# Altium PCB top_pcb_4layers_positive.PcbDoc (part 2 of 2)
Units mil, origin at the board's own origin, x right, y up, seen from the top; angles counter-clockwise.
Board outline 1559.84 x 1559.84 mil, 4 copper layers (Top Layer, GND_positive, Power_positive, Bottom Layer); 135 components, 124 nets, 727 pads, 408 vias.
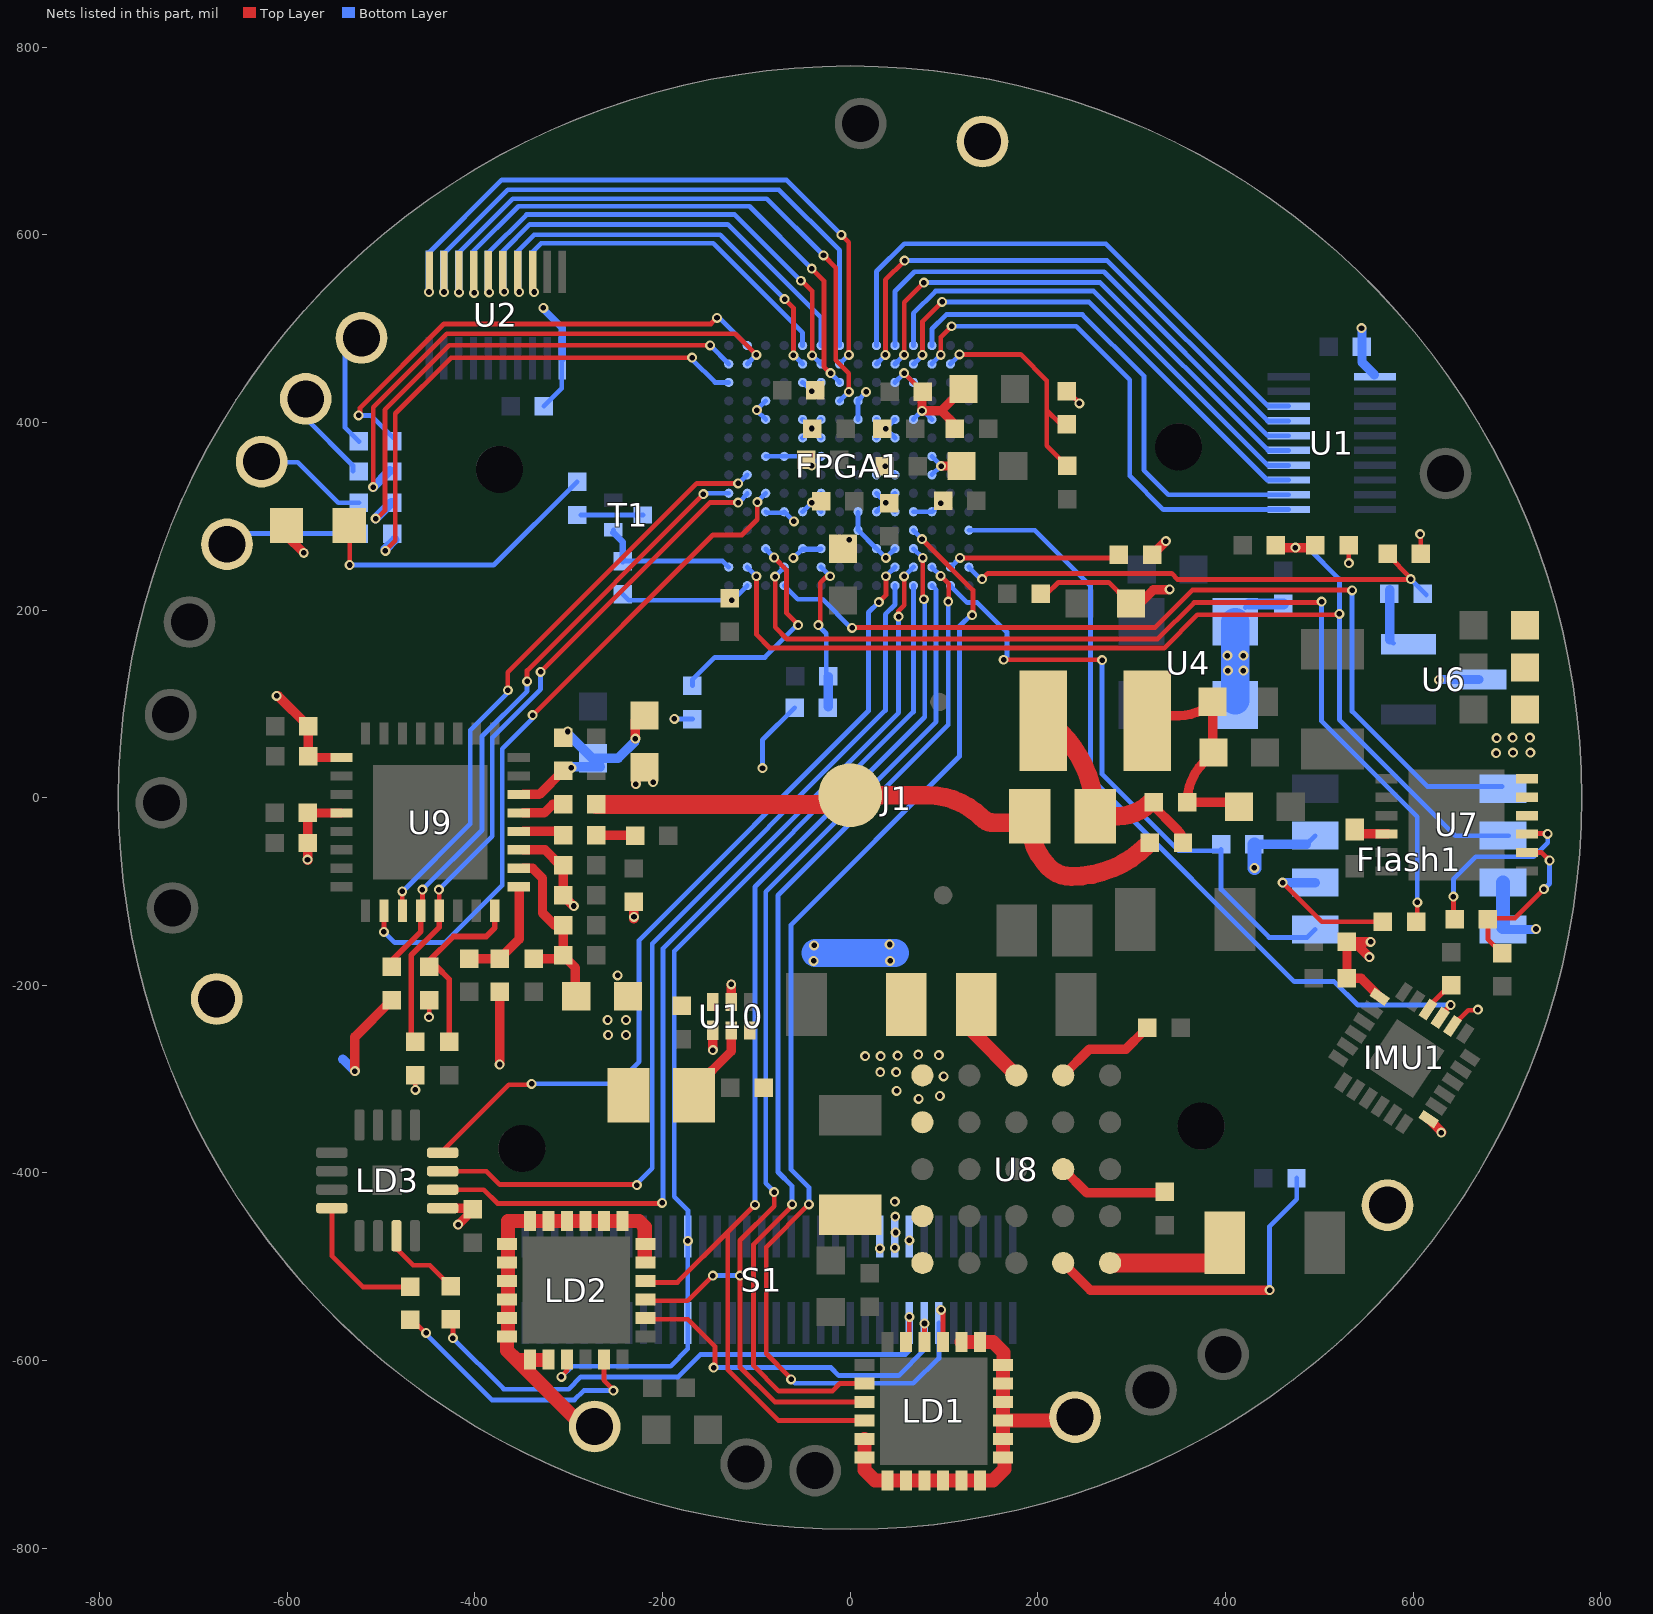
[diagram p4: the nets of this part, all layers, seen from the top]

## Via types
v1: diameter 10.63, hole 5.91, Top Layer to Bottom Layer, 324 vias
v2: diameter 10.63, hole 5.91, Top Layer to Bottom Layer, tented bottom, 83 vias
v3: diameter 19.68, hole 7.87, Top Layer to Bottom Layer, tented both sides, 1 vias

## Nets (pads, with @x,y where several pads share a name; then routed paths per layer and width w, separated by ;. In a path a pad name is that pad's centre, name@x,y a point inside that pad or via, vN(x,y) a via of type N, cw(c..) or ccw(c..) an arc to the next point about the centre after c; other vN are vias at no path point) (continued)
IMU_SPI3: FPGA1.L1 IMU1.9 | length 861.1
  Top Layer w5.12: IMU1.9@628.95,-234.59 628.95,-232.05 v1(640,-221)
  Bottom Layer w5.12: FPGA1.L1@126.45,285.1 196.9,285.1 256,226 256,21.5 473.5,-196 516,-196 541,-221 v1(640,-221)
J_TCK: T_TCK1.0 Z6.1 | length 98
  Bottom Layer w5.12: T_TCK1.0@-580.4,425.12 -580.4,404.4 -530,354 Z6.1@-530,348
J_TDI: T_TDI1.0 Z3.1 | length 125.8
  Bottom Layer w5.12: Z3.1@-523.71,379.68 -538.5,394.47 -538.5,472.5 T_TDI1.0@-519.5,491.5
J_TDO: T_TDO1.0 Z4.1 | length 131.4
  Bottom Layer w5.12: T_TDO1.0@-657.4,281.5 Z4.1@-526,281.5
J_TMS: T_TMS1.0 Z5.1 | length 120.8
  Bottom Layer w5.12: T_TMS1.0@-626.5,357 -626,357.5 -589,357.5 -545.77,314.27 Z5.1@-523.77,314.27
L\E\D\0\_\A\C\T\I\V\E\: FPGA1.L4 LD1.21 S1.30 | length 1300.9
  Top Layer w5.12: v1@-64.25,-617.75 -89.5,-592.5 -89.5,-479 v1(-44,-433.5) ; v1(76.5,275.5) 130.75,221.25 130.75,193.25 v1@130.5,193.5 ; LD1.21@98.37,-579.68 LD1.21@98.37,-571.13 ; LD1.21@98.87,-580.18 v1@98.87,-546.37
  Bottom Layer w5.12: v1(-63,-620) -58.88,-624.12 67,-624.12 94.62,-597.71 S1.30@94.57,-560.06 S1.30@94.57,-560.06 ; v1(-44,-433.5) -44,-415.5 -63,-396.5 -63,-135.5 116.5,44 116.5,182.5 v1@130,196 ; FPGA1.L4@67.4,285.1 v1@77,275.5 ; v1@77,275.5 77.5,275 v1@77,275.5
  other v1: 97,-546 130,194.5
L\E\D\1\_\A\C\T\I\V\E\: FPGA1.P4 LD2.21 S1.13 S1.58 | length 1093.4
  Top Layer w5.12: v1@-307.5,-616 -301.87,-610.37 LD2.21@-301.87,-598.82 ; v1(-173,-472.5) -172,-471.5 v1@-171.5,-471.5
  Bottom Layer w5.12: v1(-308,-617.5) -296.5,-606 -289,-606 ; -288.5,-606 -191.5,-606 -173.15,-587.65 S1.13@-173.15,-560.06 S1.58@-173.15,-471 ; S1.58@-173,-471 -173,-440 -187.5,-425.5 -187.5,-163.5 67.4,91.4 FPGA1.P4@67.4,226.05
LED0: FPGA1.N3 LD1.2 | length 1090.9
  Top Layer w5.12: v1(-62,-433.5) -62,-435 -103,-476 -103,-605.5 -76,-632.5 -19,-632.5 -10.97,-624.47 LD1.2@15.21,-624.47 ; v1(96.32,236.5) 105,227.82 v1@105,209 ; v1@104.5,208.5 v1(104.5,209) v1@104.5,209.82
  Bottom Layer w5.12: v1@-62.25,-433.25 -62,-433 -62,-414 -77,-399 -77,-104 104.5,77.5 v1(104.5,209) ; FPGA1.N3@87.08,245.73 v1(96.32,236.5)
LED1: FPGA1.M4 LD1.4 LD2.4 | length 1246
  Top Layer w5.12: LD2.4@-218.21,-515.16 -216.71,-516.66 -184.16,-516.66 -130.5,-463 ; v1(-101.5,-434) -130.5,-463 ; LD1.4@15.21,-663.84 -76.66,-663.84 -130.5,-610 -130.5,-463 ; v1(77.31,255.5) 77.31,212.69 v1(78.5,211.5)
  Bottom Layer w5.12: v1(-101.5,-434) -101.5,-95 79.5,86 79.5,210.5 v1(78.5,211.5) ; FPGA1.M4@67.4,265.42 v1(77.31,255.5)
LED2: FPGA1.P3 LD1.3 LD2.3 | length 1189.5
  Top Layer w5.12: LD2.3@-218.21,-534.84 -216.71,-536.34 -173.34,-536.34 v1(-146.5,-509.5) ; v1(-81,-420.5) -81,-435.5 -117.5,-472 v1(-117.5,-509.5) -117.5,-607 -80.34,-644.16 LD1.3@15.21,-644.16
  Bottom Layer w5.12: v1(-146.5,-509.5) v1(-117.5,-509.5) ; v1(-81,-420.5) -81,-420 -90,-411 -90,-100.5 91.5,81 91.5,221.63 FPGA1.P3@87.08,226.05
LED22-2: LD1.22 LD2.2 S1.29 | length 397.4
  Top Layer w5.12: LD2.2@-218.21,-554.53 -216.71,-556.03 -173.03,-556.03 -144,-585.05 -144,-606 v1(-145.5,-607.5) ; LD1.22@79.19,-580.18 v1(79.19,-560.5)
  Bottom Layer w5.12: v1(-145.5,-607.5) -20.5,-607.5 -12,-616 51.5,-616 78.82,-588.68 S1.29@78.82,-560.06
LED_SPI0: FPGA1.N5 LD3.4 | length 891
  Top Layer w5.12: LD3.4@-435.5,-377.5 -364,-306 v1@-340.5,-306 ; v1(30.5,208.5) 38,216 v1(38,236.02)
  Bottom Layer w5.12: v1@-341,-304 -340,-305 -248.5,-305 -225,-281.5 -225,-152 19.5,92.5 19.5,197.5 v1(30.5,208.5) ; v1(38,236.02) FPGA1.N5@47.71,245.73
  other v1: -339.5,-305
LED_SPI1: FPGA1.P5 LD3.3 | length 964.4
  Top Layer w5.12: LD3.3@-434.44,-398.16 -387.84,-398.16 -373.5,-412.5 v1@-227.5,-412.5
  Bottom Layer w5.12: v1@-227.5,-411.5 -211,-395 -211,-155.5 37.5,93 37.5,195.5 47.71,205.71 FPGA1.P5@47.71,226.05
  other v1: -227.5,-413
LED_SPI2: FPGA1.N4 LD3.2 | length 1029.3
  Top Layer w5.12: LD3.2@-434.44,-417.84 -390.66,-417.84 -376,-432.5 v1@-200.5,-432.5 ; v1@51.5,191.5 v1(51.5,193) 51.5,199 57.5,205 v1(57.5,235.83)
  Bottom Layer w5.12: v1@-199.5,-431.5 -199.5,-160.5 51.5,90.5 v1(51.5,193) ; v1(57.5,235.83) FPGA1.N4@67.4,245.73
  other v1: -200.5,-432
LEDA: LD1.5 LD1.6 LD1.7 LD1.8 LD1.9 LD1.10 LD1.11 LD1.12 LD1.13 LD1.14 LD1.15 LD1.16 LD1.17 LD1.18 LD1.19 LD1.20 T_LEDA.0 | length 444.7
  Top Layer w5.12: T_LEDA.0@238.84,-663.84 T_LEDA.0@239,-664
  Top Layer w15: LD1.5@15.21,-683.53 LD1.6@15.21,-703.21 15.21,-716.71 26.5,-728 LD1.7@44.5,-728 ; LD1.7@39.82,-727.82 LD1.8@59.5,-727.82 LD1.9@79.19,-727.82 LD1.10@98.87,-727.82 LD1.11@118.56,-727.82 LD1.12@137.32,-727.82 ; LD1.20@118.56,-580.18 LD1.19@138.24,-580.18 152.18,-580.18 163.5,-591.5 LD1.18@163.5,-605.5 ; LD1.12@138.24,-727.82 152.18,-727.82 164.5,-715.5 LD1.13@164.5,-704.5 ; LD1.13@162.85,-703.21 LD1.14@162.85,-683.53 LD1.15@162.85,-663.84 ; LD1.18@162.85,-605.35 LD1.17@162.85,-624.47 LD1.16@162.85,-644.16 LD1.15@162.85,-663.84 ; T_LEDA.0@238.84,-663.84 LD1.15@162.85,-663.84
LEDC: LD2.5 LD2.6 LD2.7 LD2.8 LD2.9 LD2.10 LD2.11 LD2.12 LD2.13 LD2.14 LD2.15 LD2.16 LD2.17 LD2.18 LD2.19 LD2.20 T_LEDC.0 | length 464.6
  Top Layer w5.12: T_LEDC.0@-289.12,-665.88 T_LEDC.0@-276.4,-665.88
  Top Layer w15: LD2.18@-365.85,-574.21 -365.85,-589.15 -355.5,-599.5 ; LD2.18@-364.68,-568.5 -364.68,-451.18 LD2.12@-341.24,-451.18 LD2.11@-321.56,-451.18 LD2.10@-301.87,-451.18 LD2.9@-282.19,-451.18 LD2.8@-262.5,-451.18 LD2.7@-246,-451.18 ; LD2.20@-325,-599.5 -355.5,-599.5 ; T_LEDC.0@-289.12,-665.88 -355.5,-599.5 ; LD2.7@-242.82,-451.18 -225.32,-451.18 -219,-457.5 LD2.5@-219,-493
MISO_A1+: FPGA1.B4 U1.18 | length 523.9
  Top Layer w5.12: v2(77,472) 77,507.5 v2(98,528.5)
  Bottom Layer w5.12: FPGA1.B4@67.4,462.27 67.77,462.27 v2@75,469.5 ; v2(98,528.5) 254.5,528.5 444.37,338.63 U1.18@467.44,338.63
MISO_A1-: FPGA1.A4 U1.17 | length 521.5
  Bottom Layer w5.12: FPGA1.A4@67.4,481.95 67.4,516.4 91,540 259.5,540 445.5,354 467.06,354 U1.17@467.44,354.38
MISO_A2+: FPGA1.B3 U1.20 | length 546.5
  Top Layer w5.12: v2(96.5,472) 96.5,491 v2(108,502.5)
  Bottom Layer w5.12: FPGA1.B3@87.08,462.27 87.08,462.58 v2@94.5,470 ; v2(108,502.5) 241,502.5 298,445.5 298,343 333.87,307.13 U1.20@467.44,307.13
MISO_A2-: FPGA1.A3 U1.19 | length 542.8
  Bottom Layer w5.12: FPGA1.A3@87.08,481.95 87.08,499.58 102.5,515 247.5,515 313,449.5 313,349 339.12,322.88 U1.19@467.44,322.88
MISO_B1+: FPGA1.D8 pad.0@-417,560.5 U2.18 | length 629.5
  Top Layer w5.12: v2(-28.5,578) -15.5,565 -15.5,466.5 -1.5,452.5 v2(-1.5,432.5)
  Bottom Layer w5.12: U2.18@-417.37,559.56 -417.37,580.63 -359.5,638.5 -89,638.5 v2(-28.5,578) ; FPGA1.D8@-11.34,422.9 -11.1,422.9 v2(-1.5,432.5)
  other v1: -417,538.5
MISO_B1-: FPGA1.C8 pad.0@-401.5,560.5 U2.17 | length 564.5
  Top Layer w5.12: v2(-41,564) -28,551 -28,459.5 v2(-21,452.5)
  Bottom Layer w5.12: U2.17@-401.62,559.56 -401.62,582.38 -353.62,630.38 -107.38,630.38 v2(-41,564) ; v2(-21,452.5) -11.34,442.84 FPGA1.C8@-11.34,442.58
  other v1: -401,538
MISO_B2+: FPGA1.B8 pad.0@-448.5,560 U2.20 | length 662.5
  Top Layer w5.12: v2(-9.5,600) -1.5,592 v2(-1.5,472)
  Bottom Layer w5.12: U2.20@-448.87,559.56 -448.87,581.13 -371.5,658.5 -68,658.5 v2(-9.5,600) ; FPGA1.B8@-11.34,462.27 -11.34,462.66 v2(-1.5,472)
  other v1: -449,539
MISO_B2-: FPGA1.A8 pad.0@-433,560.5 U2.19 | length 598.5
  Bottom Layer w5.12: U2.19@-433.12,559.56 -433.12,579.88 -365,648 -76,648 -11.34,583.34 FPGA1.A8@-11.34,481.95
  other v1: -433,539
MOSI_A+: FPGA1.B5 U1.16 | length 559.5
  Top Layer w5.12: v2(57.5,472) 57.5,528 v2(78.5,549)
  Bottom Layer w5.12: FPGA1.B5@47.71,462.27 55,469.56 v2@55,470 ; v2(78.5,549) 266.5,549 445.37,370.13 U1.16@467.44,370.13
MOSI_A-: FPGA1.A5 U1.15 | length 558.4
  Bottom Layer w5.12: FPGA1.A5@47.71,481.95 47.71,539.71 68.5,560.5 270.5,560.5 445.13,385.87 U1.15@467.44,385.87
MOSI_B+: FPGA1.B9 pad.0@-386,560.5 U2.16 | length 499.3
  Top Layer w5.12: v2(-52.5,551) -52,551.5 -40.5,540 v2(-40.5,471.5)
  Bottom Layer w5.12: U2.16@-385.87,559.56 -385.87,580.63 -345,621.5 -123,621.5 v2(-52.5,551) ; v2@-40.38,471.62 FPGA1.B9@-31.03,462.27
  other v1: -385,538.5
MOSI_B-: FPGA1.A9 pad.0@-370.5,560.5 U2.15 | length 444.5
  Bottom Layer w5.12: U2.15@-370.13,559.56 -370.13,582.37 -341.5,611 -130.5,611 -31.03,511.53 FPGA1.A9@-31.03,481.95
  other v1: -369,539.5
NetC1_2: C1.2 C2.2 L5.1 L7.2 R10.1 | length 243.1
  Top Layer w5.12: C1.2@376.88,37.84 C1.2@385.01,45.97
  Top Layer w10: L7.2@317.01,87.39 350.49,87.39 ccw(c350.49,137.95) C2.2@386.24,102.2 C1.2@386.24,44.74 ; C1.2@376.88,37.84 ccw(c419.54,-4.82) R10.1@359.21,-4.82 L5.1@412.82,-4.82
NetC7_2: C7.2 C8.2 C9.2 L3.2 U9.10 | length 203.3
  Top Layer w10: U9.10@-348.35,-75.3 -338.57,-75.3 -328,-85.87 -328,-123 -314.81,-136.18 C8.2@-305.98,-136.18 C7.2@-305.98,-168.18 ; C9.2@-337.18,-171.56 -309.36,-171.56 C7.2@-305.98,-168.18 ; L3.2@-292.06,-211.75 -293,-210.82 -293,-181.17 C7.2@-305.98,-168.18
NetC15_2: C15.2 C16.2 C17.2 L4.1 U9.14 | length 211.1
  Top Layer w5.12: L4.1@-229,82.5 L4.1@-228.5,83
  Top Layer w10: U9.14@-348.35,3.44 -331.36,3.44 C16.2@-305.98,28.82 ; v1(-229,63) L4.1@-229,82.5
  Bottom Layer w5.12: v1@-300.84,67.78 v1@-300.84,70.83 ; v1@-229,60.5 v1@-229,62.5
  Bottom Layer w10: v1@-300.84,67.78 -266.16,33.11 v1@-297.28,33.11 ; C17.2@-274.18,42.06 -247.44,42.06 v1@-229,60.5
  other v1: -297.34,31.73 -301.09,70.52
NetC18_1: C18.1 J1.0 L6.1 R9.2 | length 648.4
  Top Layer w5.12: J1.0@4.82,-7.18 J1.0@5,-7 ; R9.2@316.57,-50.52 R9.2@319.28,-47.82
  Top Layer w20: C18.1@-270.55,-7.18 J1.0@4.82,-7.18 ; J1.0@0,2.56 82.42,2.56 cw(c82.42,-79.58) 140.5,-21.5 ccw(c153.04,-8.96) 153.04,-26.69 191.86,-26.69 ccw(c258.66,-26.69) 211.43,-73.93 ccw(c235.75,-49.6) 235.75,-84 ccw(c235.75,30.31) R9.2@316.57,-50.52
NetC18_2: C18.2 U9.13 | length 46.1
  Top Layer w10: U9.13@-348.35,-16.24 -326.24,-16.24 -317.18,-7.18 C18.2@-305.98,-7.18
NetC19_1: C19.1 R3.1 | length 42.9
  Top Layer w10: C19.1@-270.55,-40.18 R3.1@-227.68,-40.18
NetC19_2: C19.2 U9.12 | length 44.1
  Top Layer w10: U9.12@-348.35,-35.93 -310.24,-35.93 C19.2@-305.98,-40.18
NetC20_2: C20.2 R4.1 U9.9 | length 117.8
  Top Layer w10: C20.2@-406.18,-171.56 R4.1@-373.68,-171.56 -353,-150.87 -353,-95.33 U9.9@-353.35,-94.98
NetD1_2: D1.2 Z10.2 | length 321.3
  Top Layer w5.12: D1.2@-534.04,290 -533.5,289.46 v1(-533.5,248)
  Bottom Layer w5.12: v1(-533.5,248) -379.9,248 Z10.2@-291.18,336.72
NetFPGA1_B2: FPGA1.B2 Z1.1 Z2.2 | length 238.5
  Top Layer w5.12: v2(116.5,472.5) 181.62,472.5 209.48,444.63 209.48,412.69 ; Z1.1@223.7,398.48 209.48,412.69 ; Z2.2@233.16,351.49 209.48,375.16 209.48,412.69
  Bottom Layer w5.12: FPGA1.B2@106.77,462.27 v2@114.5,470
NetFPGA1_M12: FPGA1.M12 Z33.2 | length 238.3
  Top Layer w5.12: v1(-81,256) -68,243 -68,197 v1@-56,185
  Bottom Layer w5.12: Z33.2@-168.18,119.22 -168.18,125.82 -144.5,149.5 -91,149.5 -58,182.5 v1@-54.5,182.5 ; FPGA1.M12@-90.08,265.42 -90.08,265.08 v1(-81,256)
  other v1: -55.5,184
NetFPGA1_N11: FPGA1.N11 Z9.2 | length 1052.4
  Top Layer w5.12: v2(-80,235.5) -80,181.62 -67.38,169 327.5,169 366.5,208 500.5,208 v1@501,208.5 ; Z9.2@603.22,-132.18 604.5,-130.9 v1(604.5,-111.5)
  Bottom Layer w5.12: v2@-79.5,236.5 -70.4,245.6 FPGA1.N11@-70.4,245.73 ; v1@502.5,208 502.5,81.5 604.5,-20.5 v1(604.5,-111.5)
  other v1: 502.5,209
NetIMU1_10: IMU1.10 Q50.1 | length 35.5
  Top Layer w5.12: IMU1.10@615.89,-225.79 615.89,-223.42 Q50.1@639.32,-199.99
NetL2_1: L2.1 U10.2 | length 79
  Top Layer w5.12: L2.1@-165.51,-310.98 L2.1@-165.51,-308.97
  Top Layer w10: L2.1@-165.51,-308.97 -126.82,-270.28 U10.2@-126.82,-248
NetL6_2: L6.2 L7.1 R9.1 R10.2 | length 243
  Top Layer w5.12: L7.1@206.38,87.39 L7.1@223.98,69.79 ; L6.2@261.05,-19.69 285.07,-19.69
  Top Layer w10: R10.2@319.78,-5.32 349.36,-34.9 cw(c336.44,-47.82) R9.1@354.71,-47.82
  Top Layer w20: L7.1@223.98,69.79 cw(c134.5,-19.69) L6.2@261.05,-19.69 ; 285.07,-19.69 ccw(c285.07,29.39) R10.2@319.78,-5.32
NetLD2_23: LD2.23 Z31.2 | length 296.3
  Top Layer w5.12: Z31.2@-469.18,-556.72 -466.78,-556.72 -452.5,-571 v1@-452,-571 ; LD2.23@-262.5,-600.5 LD2.23@-260.5,-598.5 ; LD2.23@-262.5,-598.82 -262.5,-621 v1@-252.5,-631
  Bottom Layer w5.12: v1@-453,-571 -382,-642 -294,-642 -284,-632 v1(-252.5,-632)
  other v1: -452,-570.5
NetLD3_12: LD3.12 Z31.1 | length 145.7
  Top Layer w5.12: LD3.12@-552.56,-437.53 -552.56,-488.44 -519.5,-521.5 Z31.1@-471.5,-521.5
NetLD3_15: LD3.15 Z30.1 | length 105.1
  Top Layer w5.12: LD3.15@-483.66,-481.84 LD3.15@-483.66,-467.06 ; LD3.15@-483.5,-465 -483.5,-481 -466,-498.5 -447.97,-498.5 Z30.1@-425.68,-520.79
NetQ29_2: Q29.2 U7.4 | length 37.8
  Top Layer w5.12: Q29.2@535,-38 Q29.2@535.34,-38.34
  Top Layer w10: Q29.2@535.34,-38.34 U7.4@572.7,-38.34
NetQ34_2: Q34.2 U8.A3 | length 95.1
  Top Layer w5.12: Q34.2@130.85,-249.85 Q34.2@130.85,-220
  Top Layer w15: Q34.2@130.85,-249.85 U8.A3@177,-296
NetQ35_2: Q35.2 U8.E5 | length 125.2
  Top Layer w5.12: Q35.2@396.5,-496 Q35.2@400.5,-500
  Top Layer w20: U8.E5@277,-496 Q35.2@396.5,-496
NetR5_1: R5.1 R6.2 U9.8 | length 202.6
  Top Layer w6: R6.2@-427.31,-260.28 -427.31,-193.68 -440.71,-180.29 R5.1@-448.68,-180.29 -448.68,-173.68 -423,-148 -388,-148 -378.94,-138.94 U9.8@-378.94,-120.57
NetT1_3: T1.3 Z10.1 | length 66.3
  Bottom Layer w5.12: Z10.1@-287.26,301.26 T1.3@-220.95,301.26
NetU6_2: U6.2 Z8.2 | length 58.9
  Bottom Layer w5.12: U6.2@575.28,168.22 U6.2@579,164.5
  Bottom Layer w10: U6.2@575.28,168.22 Z8.2@575.28,221.82
NetU7_8: U7.8 Z18.2 Z19.1 | length 180.5
  Top Layer w5.12: Z18.2@681,-128.5 708.5,-128.5 v1(739.5,-97.5) ; Z18.2@685.82,-129.68 Z18.2@679.72,-129.68 679.72,-150.69 Z19.1@694.82,-165.79 ; U7.8@721.3,-58.53 737.03,-58.53 v1(745.5,-67)
  Bottom Layer w5.12: v1(739.5,-97.5) 745.5,-91.5 v1(745.5,-67)
NetU7_9: U7.9 Z18.1 | length 188.2
  Top Layer w5.12: v1(643,-105.5) 643,-128.4 Z18.1@644.29,-129.68 ; U7.9@722.3,-38.34 v1@741.16,-38.34
  Bottom Layer w5.12: v1(643,-105.5) 643,-87 667,-63 728.5,-63 743.5,-48 v1(743.5,-38.5)
NetU8_A4: U8.A4 Z21.1 | length 105.5
  Top Layer w10: U8.A4@227,-296 255,-268 294,-268 Z21.1@313,-249
NetU8_C4: U8.C4 Z20.1 | length 116.6
  Top Layer w5.12: Z20.1@329,-421 Z20.1@332,-424
  Top Layer w10: U8.C4@227,-396 252,-421 Z20.1@329,-421
NetU8_E4: U8.E4 Z22.1 | length 363.5
  Top Layer w10: U8.E4@227,-496 256,-525 v1(447,-525)
  Bottom Layer w5.12: v1(447,-525) 447,-457 476,-428 Z22.1@476,-405.5
PCLK: FPGA1.H13 U9.3 | length 640.7
  Top Layer w5.12: v2(-477.5,-100) -477.5,-120.44 U9.3@-477.36,-120.57 ; v2(-365,114.5) -365,133.5 -163.5,335 v2(-119.5,335)
  Bottom Layer w5.12: v2@-479,-101.5 v2@-478.5,-101.5 ; v2@-477.25,-100.25 -405,-28 -405,72 v2@-365,112 ; v2@-119,335.5 -118.43,335.5 FPGA1.H13@-109.77,344.16
S_CLOCK: Flash1.6 FPGA1.N13 Z16.1 Z17.2 | length 1200.6
  Top Layer w5.12: v2(-100,236) -100,174 -85.5,159.5 334.5,159.5 370,195 v1@521.5,195 ; Z16.1@493.47,266.5 Z16.1@495.79,268.82
  Top Layer w10: Z17.2@456.04,266.5 v1(474.5,266.5) Z16.1@493.47,266.5
  Bottom Layer w5.12: FPGA1.N13@-109.77,245.73 v2(-100,236) ; v1@475,266 488.52,266 521.5,233.02 v1(521.5,196) 521.5,83 645,-40.5 Flash1.6@695.68,-40.5 Flash1.6@702,-40.5
S_DATA_IN: Flash1.5 FPGA1.P11 | length 963.2
  Top Layer w5.12: v1(2,181) 2,179.5 4,181.5 325,181.5 365,221.5 v1@534.5,221.5
  Bottom Layer w5.12: FPGA1.P11@-70.4,226.05 -55.85,211.5 -29.5,211.5 v1@0.75,181.25 ; v1(535,221) 535,92 615,12 Flash1.5@695,12
S_DATA_OUT: Flash1.2 Z9.1 | length 158.7
  Top Layer w5.12: v1(461,-90.5) 502.68,-132.18 Z9.1@567.79,-132.18
  Bottom Layer w10: v1(461,-90.5) Flash1.2@495.68,-90.5
S_SELCTN: Flash1.1 FPGA1.P2 Z15.1 | length 662.4
  Top Layer w5.12: v1(163.5,147) v1@268,147
  Bottom Layer w5.12: FPGA1.P2@106.77,226.05 124.81,208 135.5,208 167,176.5 v1@167,149 ; v1(268.5,146.5) 268.5,25 350,-56.5 Z15.1@395.29,-56.5 ; Z15.1@395.29,-55.32 Z15.1@395.29,-56.5 ; Flash1.1@495.68,-140.5 487.18,-149 446.5,-149 395.29,-97.79 Z15.1@395.29,-56.5
SCL: FPGA1.J14 R8.1 U9.4 | length 668
  Top Layer w5.12: U9.4@-457.68,-120.57 -456,-118.89 v2(-456,-98) ; v2(-344.5,124) -344.5,135.5 v2(-156.5,323.5)
  Top Layer w6: R8.1@-488.68,-180.29 -488.68,-173.68 -457.68,-142.68 U9.4@-457.68,-120.57
  Bottom Layer w5.12: v2(-456,-98) -392.5,-34.5 -392.5,65.5 -344.5,113.5 v2(-344.5,124) ; v2@-156.03,324.47 FPGA1.J14@-129.45,324.47
SCLK_A+: FPGA1.B6 U1.14 | length 598.4
  Top Layer w5.12: v2(37.5,472) 37.5,552 v2@57.5,572
  Bottom Layer w5.12: FPGA1.B6@28.03,462.27 v2@35,469.24 ; v2(58,572.5) 274,572.5 444.88,401.62 U1.14@467.44,401.62
SCLK_A-: FPGA1.A6 U1.13 | length 602.4
  Bottom Layer w5.12: FPGA1.A6@28.03,481.95 28.03,561.03 57.5,590.5 272.5,590.5 445.63,417.37 U1.13@467.44,417.37
SCLK_B+: FPGA1.B10 pad.0@-354.5,560.5 U2.14 | length 420.8
  Top Layer w5.12: v2(-70,531.5) -60.5,522 v2(-60.5,471.5)
  Bottom Layer w5.12: U2.14@-354.38,559.56 -354.38,582.62 -337,600 -138.5,600 v2(-70,531.5) ; v2@-60.5,472 -60.44,472 FPGA1.B10@-50.71,462.27
  other v1: -353,539
SCLK_B-: FPGA1.A10 pad.0@-338.5,560.5 U2.13 | length 367.1
  Bottom Layer w5.12: U2.13@-338.63,559.56 -338.63,581.87 -329.5,591 -146.21,591 -50.71,495.5 FPGA1.A10@-50.71,481.95
  other v1: -337,539
SDA: FPGA1.J13 R7.1 U9.5 | length 744.5
  Top Layer w5.12: U9.5@-437.99,-120.57 v2@-437.99,-98.51 ; v2(-330,134) -149.5,314.5 v2(-119.5,314.5)
  Top Layer w6: R7.1@-468,-255.97 -468,-168 -438,-138 U9.5@-437.99,-120.57
  Bottom Layer w5.12: v2(-438.5,-98) -381.5,-41 -381.5,64 -330,115.5 v2(-330,134) ; v2@-118,315.5 -109.77,323.73 FPGA1.J13@-109.77,324.47
VCC33: Q26.2 Q27.2 Q28.2 Q42.1 Q43.1 T_VCC33.0 U1.10 U2.10 U7.10 U7.11 U7.12 | length 192.4
  Top Layer w5.12: Q27.2@719.27,183.8 Q27.2@719.27,193.73
  Bottom Layer w5.12: Q43.1@-326.51,417.18 -307.5,436.19 U2.10@-307.5,474
  Bottom Layer w8: v1(-327,522) -327.5,522 -328,521.5 -307.13,500.63 U2.10@-307.13,467.94
  Bottom Layer w10: v1@545.49,499.99 Q42.1@545.49,480.68 545.49,464.01 U1.10@558.5,451
  other v1: 688.5,47.5 706.5,48 725,48 689,63.5 706,64 724.5,64 545,500.5
VDD12: FPGA1.E5 FPGA1.E6 FPGA1.E9 FPGA1.E10 FPGA1.F5 FPGA1.F6 FPGA1.F9 FPGA1.F10 FPGA1.J5 FPGA1.J6 FPGA1.J9 FPGA1.K5 FPGA1.K6 FPGA1.K9 FPGA1.K10 Q6.2 Q7.2 Q8.2 Q9.2 Q10.2 Q33.2 U8.A1 U8.B1 | length 242.1
  Top Layer w5.12: Q33.2@59.65,-220.5 59.65,-215.5 Q33.2@59.65,-207.65
  Top Layer w6: Q33.2@59.65,-215.5 Q33.2@74.65,-200.5
  Bottom Layer w5.12: FPGA1.K10@-50.71,304.79 v2(-41,314.5) ; FPGA1.F10@-50.71,383.53 -41,393.24 v2(-41,393.5) ; FPGA1.E10@-50.71,403.21 v2(-41,393.5) ; v2@-40,392.5 FPGA1.F9@-31.03,383.53 ; FPGA1.K9@-31.03,304.79 -40.74,314.5 v2(-41,314.5) ; FPGA1.J9@-31.03,324.47 v2(-41,314.5) ; FPGA1.E9@-31.03,403.21 -31.29,403.21 v2(-41,393.5) ; FPGA1.K6@28.03,304.79 37.74,314.5 v2(38,314.5) ; FPGA1.J6@28.03,324.47 v2(38,314.5) ; FPGA1.F6@28.03,383.53 FPGA1.E5@47.71,403.21 ; FPGA1.E6@28.03,403.21 36.74,394.5 37.87,393.37 v2(38,393.24) FPGA1.F5@47.71,383.53 ; FPGA1.K5@47.71,304.79 v2(38,314.5) ; FPGA1.J5@47.71,324.21 FPGA1.J5@47.71,324.47 38,314.76 v2(38,314.5)
  other v1: 73,-321 95.5,-318 49.5,-312.5 99.5,-297 32,-292.5 49,-292.5 16,-275.5 32.5,-275.5 50.5,-275 72.5,-274 94.5,-274.5
  other v2: -1,275
VDD18: C4.2 C5.2 C6.2 C10.2 C11.2 C12.2 L2.2 L3.1 L4.2 R5.2 T_VDD18.0 U9.11 U9.28 U10.6 | length 233.9
  Top Layer w5.12: U9.28@-542.4,-16.32 U9.28@-542.32,-16.24 ; v1@-448.68,-236.32 R5.2@-448.68,-215.72 ; U10.6@-146.56,-217.63 U10.6@-146.5,-217.68
  Top Layer w10: v1@-578.05,-66.95 C5.2@-578.05,-48.32 C6.2@-578.05,-16.32 U9.28@-542.4,-16.32 ; U9.11@-348.35,-55.61 -325.38,-55.61 -308.81,-72.18 C11.2@-305.98,-72.18 C10.2@-305.98,-104.18 -295,-115.5 v1(-294.5,-115.5) ; v1@-230.82,-129.32 C12.2@-230.82,-110.94 ; v1(-228.5,14.5) L4.2@-228.5,25.5
  other v1: -258,-253 -239,-253 -258.5,-237 -239,-237 -449,-234 -248,-189.5 -230.5,-127 -578.5,-66 -210,16.5
VDD33: C3.2 C13.2 C14.2 D1.1 Flash1.3 Flash1.7 Flash1.8 FPGA1.C4 FPGA1.C5 FPGA1.C9 FPGA1.C10 FPGA1.D7 FPGA1.D12 FPGA1.E3 FPGA1.E4 FPGA1.E7 FPGA1.E12 FPGA1.G3 FPGA1.G9 FPGA1.G10 FPGA1.G11 FPGA1.G12 FPGA1.H3 FPGA1.H5 FPGA1.H6 FPGA1.K3 FPGA1.K4 FPGA1.K7 FPGA1.K11 FPGA1.K12 FPGA1.L7 FPGA1.M5 FPGA1.M6 FPGA1.M9 FPGA1.M10 FPGA1.P13 IMU1.1 IMU1.8 IMU1.13 LD3.1 Q1.2 Q3.2 Q4.2 Q12.2 Q13.2 Q14.2 Q18.2 Q19.2 Q23.2 Q32.2 Q48.1 Q49.1 Q55.1 Q61.2 Q62.2 Q63.2 R4.2 R7.2 R8.2 S1.43 S1.44 S1.45 T_VCC1.0 U4.1 U4.4 U6.3 U8.D1 U8.E1 U9.25 U10.1 U10.3 U10.5 Z1.2 Z7.1 Z11.2 Z12.2 Z14.1 Z15.2 Z16.2 Z33.1 | length 2154.3
  Top Layer w5.12: D1.1@-600.96,279.46 D1.1@-600.96,290 ; C14.2@-577.55,44.18 C14.2@-576.18,42.81 ; v1@-463.68,-307.82 R7.2@-463.68,-295.72 ; Q55.1@-402.98,-440.3 Q55.1@-402.98,-439.45 ; v1(57.56,452.43) 78.5,431.5 Q19.2@78.5,430.5 ; Q19.2@76.5,428.5 Q19.2@78.5,430.5 ; U8.E1@77,-494.5 U8.E1@78.25,-495.75 ; Q19.2@79,431 Q19.2@78.5,430.5 ; Q62.2@115,394 Q62.2@115,394.32 ; Q12.2@118.54,353.5 Q12.2@118.74,353.7 ; Q61.2@120,435.32 Q61.2@120,435.5 ; Q13.2@202.94,217.18 209.68,217.18 222,229.5 275.5,229.5 Q1.2@295,210 ; Z1.2@230.87,433.28 231.57,433.28 v1@245.01,419.84 ; Q1.2@299.26,206.8 Q1.2@308.3,206.8 ; Z16.2@531,272 531,271.5 531.5,271 v1(531.5,250) ; Q49.1@533,-155 Q49.1@538.5,-155 ; Z7.1@608.22,260.18 v1@608.22,280.28 ; v1@630.5,-357.5 v1@630.5,-356.48 ; IMU1.8@642,-243.4 658.9,-226.5 v1@665.5,-226.5
  Top Layer w10: v1@-609.87,108.5 C13.2@-577.55,76.18 C14.2@-577.55,44.18 ; D1.1@-600.96,279.46 v1(-582.5,261) ; C14.2@-576.18,42.81 U9.25@-542.32,42.81 ; v1(-528,-291.5) -528,-255.04 R8.2@-488.68,-215.72 ; LD3.1@-434.44,-437.53 Q55.1@-405.47,-437.53 ; v1(-417.86,-455.18) Q55.1@-402.98,-440.3 ; v1@-373.68,-283.67 R4.2@-373.68,-206.99 ; v1(-146.5,-269) U10.1@-146.5,-248 ; U10.5@-126.82,-217.68 v1(-126.82,-199) ; Q19.2@76.5,428.5 v1(76.5,412.32) 97,412.32 ; v1(97,353.5) Q12.2@118.54,353.5 ; Q62.2@115,394.32 97,412.32 ; Q61.2@120,435.32 97,412.32 ; Q1.2@308.3,206.8 323,221.5 v1@338,221.5 ; Z14.1@321.71,258.68 v1(336.5,273.47) ; Q49.1@529.49,-155 Q48.1@529.49,-192.68 544.68,-192.68 IMU1.13@564.38,-212.39 ; Q49.1@533,-153.68 v1(554.68,-153.68) ; Q49.1@538.5,-155 v1(553.5,-170) ; IMU1.1@616.63,-342.61 v1@630.5,-356.48
  Bottom Layer w5.12: -540.84,-278.66 -540.84,-277.41 ; Z11.2@-242.32,216.78 -236.04,210.5 v1(-126.5,210.5) -125.31,210.5 FPGA1.P13@-109.77,226.05 ; v1@-190.29,83.79 Z33.1@-168.18,83.79 ; v1@-93.5,32.5 -93.5,61.54 Z12.2@-59.22,95.82 ; FPGA1.K12@-90.08,304.79 -88.92,303.63 -71.56,303.63 FPGA1.K11@-70.4,304.79 v1(-60.11,294.5) v1@-60,294.5 ; FPGA1.G12@-90.08,363.84 FPGA1.G11@-70.4,363.84 FPGA1.G10@-50.71,363.84 -41,354.13 v2(-41,354) -40.87,354 FPGA1.G9@-31.03,363.84 ; FPGA1.E12@-90.08,403.21 -99.5,412.63 v1(-99.5,413) -99.5,413.48 FPGA1.D12@-90.08,422.9 ; v1(-60.5,255.5) -51.5,264.5 -31.94,264.5 FPGA1.M9@-31.03,265.42 FPGA1.M10@-50.71,265.42 ; FPGA1.C10@-50.71,442.58 -40.5,432.37 v1@-40.5,432 ; v1(-41,433) -40,434 -39.61,434 FPGA1.C9@-31.03,442.58 ; FPGA1.E7@8.34,403.21 FPGA1.D7@8.34,422.9 8.34,423.84 v1(17,432.5) ; FPGA1.K7@8.5,304 8.34,303.84 FPGA1.L7@8.34,285.1 FPGA1.M6@28.03,265.42 28.08,265.42 v1(38,255.5) 38,255.7 FPGA1.M5@47.71,265.42 ; FPGA1.H6@28.03,344.16 28.16,344.16 v2(37.5,353.5) 38.37,353.5 FPGA1.H5@47.71,344.16 ; FPGA1.C5@47.71,442.58 v1(57.56,452.43) ; v1(57.56,452.43) FPGA1.C4@67.4,442.58 ; FPGA1.K4@67.4,304.79 FPGA1.K3@87.08,304.79 87.29,304.79 v1(96.5,314) ; FPGA1.E4@67.4,403.21 v1(76.5,412.32) 77.98,412.32 FPGA1.E3@87.08,403.21 ; FPGA1.H3@87.08,344.16 96.43,353.5 v1(97,353.5) 97,353.93 FPGA1.G3@87.08,363.84 ; U4.1@410.49,103.51 U4.1@419,95 ; U4.4@421.08,202.58 U4.4@425.06,206.56 ; Flash1.3@486.37,-49.82 Flash1.3@495.68,-40.5 ; Flash1.8@695.68,-137.68 Flash1.8@697.5,-139.5
  Bottom Layer w10: -540.84,-278.66 v1(-528,-291.5) ; Z15.2@430.72,-49.82 Flash1.3@486.37,-49.82 ; v1@629,126 U6.3@669.9,126 ; Flash1.8@695.68,-140.5 v1@731,-140.5
  Bottom Layer w12: U4.4@425.06,206.56 Q14.2@461.82,206.56
  Bottom Layer w15: v1(430.72,-74.78) Z15.2@430.72,-49.82 ; Flash1.8@695.68,-137.68 Flash1.7@695.68,-90.5
  Bottom Layer w30: -37,-165.5 47.5,-165.5 ; U4.1@410.49,103.51 U4.4@410.49,187.37
  other v1: 31.5,-480.5 47.5,-480 63,-472 48.5,-463.5 48,-446.5 47.5,-430.5 630,-357 -463.5,-311.5 -373.76,-284.42 669,-226 -39,-174 42.5,-174 -38.5,-157.5 42,-156.5 731,-140 -93.5,31.5 -187.5,84 -611.5,108.5 627.5,125.5 402.5,135.5 419,135.5 402,151.5 419,151.5 340.5,222 607.5,281 244.16,420.27
VS: FPGA1.J12 U9.2 | length 730.1
  Top Layer w5.12: v2@-497.05,-142.95 U9.2@-497.05,-120.57 ; v2(-338.44,87.94) -146.38,280 -115.5,280 -99,296.5 v2(-99,315)
  Bottom Layer w5.12: v2(-497,-143) -485.5,-154.5 -432,-154.5 -371,-93.5 -371,52 -338.44,84.56 v2(-338.44,87.94) ; v2@-98.5,315.5 -98.5,316.06 FPGA1.J12@-90.08,324.47
X_DONE: FPGA1.N14 T1.1 Z11.1 | length 153
  Bottom Layer w5.12: T1.1@-252.45,282.45 T1.1@-252.45,285.52 ; Z11.1@-242.32,252.21 -135.93,252.21 FPGA1.N14@-129.45,245.73
  Bottom Layer w7: T1.1@-252.45,282.45 -242.32,272.32 Z11.1@-242.32,252.21
X_INIT: FPGA1.N2 Z14.2 | length 179
  Top Layer w5.12: v2(117,255.5) Z14.2@282.45,255.5
  Bottom Layer w5.12: FPGA1.N2@106.77,245.73 107.23,245.73 v2@116.5,255
X_M1: FPGA1.N9 Z12.1 Z13.2 | length 174.3
  Top Layer w5.12: v1@-33,182.5 -32,183.5 -32,229 v2@-24,237 ; v2@-23.5,236 v2(-21.5,236)
  Bottom Layer w5.12: v1@-34.5,184 -25.5,175 Z13.2@-25.5,121.5 ; FPGA1.N9@-31.03,245.73 -31.03,245.53 v2(-21.5,236) v2@-21,235.5 ; Z12.1@-24,96 Z12.1@-23.28,96.72
  Bottom Layer w10: Z12.1@-23.28,96.72 Z13.2@-23.28,129.18
  other v1: -34,184
X_PROG: FPGA1.N1 Z7.2 Z8.1 | length 539.5
  Top Layer w5.12: v1(140.5,233) 146.5,239 342.5,239 349,232.5 596,232.5 597.5,234 572.79,258.71 Z7.2@572.79,260.18 ; Z7.2@569,265 Z7.2@571,265
  Bottom Layer w5.12: FPGA1.N1@126.45,245.73 v1@136.68,235.5 ; v1(597.5,233) 614,216.5 Z8.1@614,216
X_TCK: FPGA1.B13 Z6.2 | length 573.9
  Top Layer w5.12: v1@-508.5,333.5 -508.5,416 -430,494.5 -122.5,494.5 v2(-100,472)
  Bottom Layer w5.12: Z6.2@-491,348.5 Z6.2@-488.5,348.5 ; FPGA1.B13@-109.73,462.27 v2(-100,472)
  Bottom Layer w10: v1(-508.5,331) Z6.2@-491,348.5
X_TDI: FPGA1.A13 Z3.2 | length 517.2
  Top Layer w5.12: v1@-522.5,408.5 -522.5,415.5 -433,505 -148.5,505 v1(-142,511.5)
  Bottom Layer w5.12: v1(-524,407.5) -511,407.5 Z3.2@-487.5,384 ; v1@-140.66,512.84 FPGA1.A13@-109.77,481.95
X_TDO: FPGA1.C14 Z4.2 | length 557.4
  Top Layer w5.12: v1@-494.5,264.5 -485,274 -485,409.5 -425.5,469 v1(-168.5,469)
  Bottom Layer w5.12: v1(-495.5,263) v1@-495.5,265 ; v1(-168.5,469) -168.5,467 -144.08,442.58 FPGA1.C14@-129.45,442.58
  Bottom Layer w10: v1@-495.5,265 Z4.2@-485.5,275
X_TMS: FPGA1.B14 Z5.2 | length 549.5
  Top Layer w5.12: v1(-506,297.5) v1@-506,299 ; v1@-505,297 -496,306 -496,413.5 -427.34,482.16 v1(-149.34,482.16)
  Bottom Layer w5.12: Z5.2@-489,314.5 Z5.2@-488.5,314.5 ; v1(-149.34,482.16) FPGA1.B14@-129.45,462.27
  Bottom Layer w10: v1(-506,297.5) Z5.2@-489,314.5
Z30CONN: LD1.23 S1.28 Z30.2 | length 600.6
  Top Layer w5.12: Z30.2@-424.5,-555.5 -423.5,-556.5 v1(-423.5,-576) ; LD1.23@63,-577 v1(63,-553.5)
  Bottom Layer w5.12: v1@-424,-576 v1@-423.75,-576.25 ; v1(-423.5,-576) -369.5,-630 -369.5,-630.5 -300,-630.5 -287,-617.5 -183.5,-617.5 -159.63,-593.63 58.87,-593.63 63.07,-589.43 S1.28@63.07,-560.06
pads on no net: FPGA1.A2 FPGA1.A12 FPGA1.B1 FPGA1.B12 FPGA1.C1 FPGA1.C11 FPGA1.D1 FPGA1.D2 FPGA1.D3 FPGA1.D4 FPGA1.D11 FPGA1.E1 FPGA1.E2 FPGA1.F2 FPGA1.F3 FPGA1.F4 FPGA1.G1 FPGA1.G2 FPGA1.H1 FPGA1.H2 FPGA1.J1 FPGA1.J2 FPGA1.J3 FPGA1.J4 FPGA1.K2 FPGA1.K14 FPGA1.L8 FPGA1.L13 FPGA1.L14 FPGA1.M8 FPGA1.M13 FPGA1.M14 FPGA1.N6 FPGA1.N7 FPGA1.N8 FPGA1.N10 FPGA1.N12 FPGA1.P6 FPGA1.P7 FPGA1.P8 FPGA1.P9 FPGA1.P10 FPGA1.P12 IMU1.2 IMU1.3 IMU1.4 IMU1.5 IMU1.6 IMU1.7 IMU1.12 IMU1.14 IMU1.15 IMU1.16 IMU1.17 IMU1.19 IMU1.21 IMU1.PAD LD2.22 LD3.5 LD3.6 LD3.8 LD3.9 LD3.10 LD3.13 LD3.16 LD3.PAD S1.1 S1.2 S1.3 S1.4 S1.5 S1.6 S1.7 S1.8 S1.9 S1.10 S1.11 S1.12 S1.14 S1.15 S1.16 S1.17 S1.18 S1.19 S1.20 S1.21 S1.24 S1.25 S1.26 S1.27 S1.40 S1.41 S1.42 S1.46 S1.47 S1.49 S1.50 S1.51 S1.52 S1.53 S1.54 S1.55 S1.56 S1.57 S1.59 S1.60 S1.61 S1.62 S1.63 S1.64 S1.65 S1.66 S1.67 S1.68 S1.69 S1.70 U7.5 U8.A5 U8.B4 U8.C3 U8.D4 U8.E3

## Polygon pours and split planes (outlines as drawn)
GND on Top Layer "Top Layer-No Net" (solid, pour order 46): 258,-187 407,-187 407,-491 258,-491 258,-187
+VCOAX_5.5V on Top Layer "Top Layer-No Net" (solid, pour order 53): 103,-412 253.5,-412 253.5,-569 103,-569 103,-412
+VCOAX_5.5V on Top Layer "Top Layer-No Net" (solid, pour order 83): 139,-330 250,-330 250,-568 139,-568 139,-330
+VCOAX_5.5V on Top Layer "Top Layer-No Net" (solid, pour order 84): 107.5,-262 250,-262 250,-357 107.5,-357 107.5,-262
GND on Top Layer "Top Layer-No Net" (solid, pour order 85): 12,-200.5 139.5,-200.5 139.5,-425.5 12,-425.5 12,-200.5
VDD33 on Top Layer "Top Layer-No Net" (solid, pour order 87): -234.5,-393 90,-393 90,-528.5 -234.5,-528.5 -234.5,-393
GND on Top Layer "Top Layer-No Net" (solid, pour order 88): -69.5,-147.5 114.5,-147.5 114.5,-379.5 -69.5,-379.5 -69.5,-147.5
VDD12 on Top Layer "Top Layer-No Net" (solid, pour order 89): -3.5,-147.5 100,-147.5 100,-358 -3.5,-358 -3.5,-147.5
VDD33 on Top Layer "Top Layer-No Net" (solid, pour order 86): -113,-233 -78,-233 -78,-397 -113,-397 -113,-233
+VCOAX_5.5V on Top Layer "Top Layer-No Net" (solid, pour order 52): 439.19,137.75 589.69,137.75 589.69,-67.25 439.19,-67.25 439.19,137.75
VCC33 on Top Layer "Top Layer-No Net" (solid, pour order 51): 668.16,134.5 744.5,134.5 744.5,-22.5 668.16,-22.5 668.16,134.5
VCC33 on Top Layer "Top Layer-No Net" (solid, pour order 50): 683.5,199.5 734,199.5 734,42.5 683.5,42.5 683.5,199.5
VDD18 on Top Layer "Top Layer-No Net" (solid, pour order 49): -268,-180 -197.31,-180 -197.31,-387 -268,-387 -268,-180
VDD18 on Top Layer "Top Layer-No Net" (solid, pour order 48): -218,-180 -139.5,-180 -139.5,-232.22 -218,-232.22 -218,-180
GND on GND_positive "Top Layer-No Net" (solid, pour order 47): -779.97,0.01 ccw(c-0.05,0.01) -0.05,-779.91 ccw(c-0.05,0.01) 779.87,0.01 ccw(c-0.05,0.01) -0.05,779.93 ccw(c-0.05,0.01)
VDD12 on Power_positive "Top Layer-No Net" (solid, pour order 82): -55,410 55,410 55,325 -55,325 -55,410
VDD12 on Power_positive "Top Layer-No Net" (solid, pour order 81): -50,335 60,335 60,295 -50,295 -50,335
VDD12 on Power_positive "Top Layer-No Net" (solid, pour order 80): -20,310 25,310 25,-345 -20,-345 -20,310
VDD12 on Power_positive "Top Layer-No Net" (solid, pour order 79): -20,310 25,310 25,-345 -20,-345 -20,310
VDD12 on Power_positive "Top Layer-No Net" (solid, pour order 78): 15,-235 130,-235 130,-350 15,-350 15,-235
VDD18 on Power_positive "Top Layer-No Net" (solid, pour order 77): -790,35 -200,35 -200,-165 -790,-165 -790,35
VDD18 on Power_positive "Top Layer-No Net" (solid, pour order 76): -775,-70 -205,-70 -205,-270 -775,-270 -775,-70
+VCOAX_5.5V on Power_positive "Top Layer-No Net" (solid, pour order 75): -377.41,-416.97 -34.4,-416.97 -34.4,-745 -377.41,-745 -377.41,-416.97
+VCOAX_5.5V on Power_positive "Top Layer-No Net" (solid, pour order 74): -235,-548.2 281.02,-548.2 281.02,-780 -235,-780 -235,-548.2
+VCOAX_5.5V on Power_positive "Top Layer-No Net" (solid, pour order 73): 93.76,-410 194.47,-410 194.47,-756.62 93.76,-756.62 93.76,-410
+VCOAX_5.5V on Power_positive "Top Layer-No Net" (solid, pour order 72): 249.13,-545.31 408.43,-545.31 408.43,-720 249.13,-720 249.13,-545.31
+VCOAX_5.5V on Power_positive "Top Layer-No Net" (solid, pour order 71): 374.69,-543.62 465.27,-543.62 465.27,-660 374.69,-660 374.69,-543.62
VCC33 on Power_positive "Top Layer-No Net" (solid, pour order 70): -275,775 -75,775 -75,460 -275,460 -275,775
VCC33 on Power_positive "Top Layer-No Net" (solid, pour order 69): -90,795 110,795 110,460 -90,460 -90,795
VCC33 on Power_positive "Top Layer-No Net" (solid, pour order 68): 85,770 285,770 285,460 85,460 85,770
VCC33 on Power_positive "Top Layer-No Net" (solid, pour order 67): 267,660 487,660 487,300 267,300 267,660
VCC33 on Power_positive "Top Layer-No Net" (solid, pour order 66): 395,600 560,600 560,310 395,310 395,600
VCC33 on Power_positive "Top Layer-No Net" (solid, pour order 65): 645,225 775,225 775,-35 645,-35 645,225
VCC33 on Power_positive "Top Layer-No Net" (solid, pour order 64): 645,425 705,425 705,220 645,220 645,425
VCC33 on Power_positive "Top Layer-No Net" (solid, pour order 63): 645,335 750,335 750,80 645,80 645,335
VCC33 on Power_positive "Top Layer-No Net" (solid, pour order 62): 555,530 625,530 625,305 555,305 555,530
VCC33 on Power_positive "Top Layer-No Net" (solid, pour order 61): 540,460 655,460 655,300 540,300 540,460
VCC33 on Power_positive "Top Layer-No Net" (solid, pour order 60): 265,725 405,725 405,535 265,535 265,725
+VCOAX_5.5V on Power_positive "Top Layer-No Net" (solid, pour order 59): 325,-550 555,-550 555,-620 325,-620 325,-550
VCC33 on Power_positive "Top Layer-No Net" (solid, pour order 58): -355,720 -242,720 -242,460 -355,460 -355,720
VCC33 on Power_positive "Top Layer-No Net" (solid, pour order 57): -451.75,685 -290,685 -290,402.94 -451.75,402.94 -451.75,685
VCC33 on Power_positive "Top Layer-No Net" (solid, pour order 56): -535,630 -430,630 -430,405 -535,405 -535,630
VCC33 on Power_positive "Top Layer-No Net" (solid, pour order 55): -610,555 -495,555 -495,405 -610,405 -610,555
VCC33 on Power_positive "Top Layer-No Net" (solid, pour order 54): -660,491.97 -320,491.97 -320,406.97 -660,406.97 -660,491.97
VDD33 on Power_positive "Top Layer-No Net" (solid, pour order 90): -779.92,0 ccw(c0,0) 0,-779.92 ccw(c0,0) 779.92,0 ccw(c0,0) 0,779.92 ccw(c0,0)

## Keep-outs
Keep-Out Layer:
  circle w3.94: c0,0 r787.4

## Other copper
GND_positive:
  pour cut-out: -701.5,409.25 -288,409.25 -288,404.75 -701.5,404.75
  pour cut-out: -292.5,461.5 -288,461.5 -288,407.5 -292.5,407.5
  pour cut-out: -292.5,461.5 -288,461.5 -288,407.5 -292.5,407.5
  pour cut-out: 260,461.5 264.5,461.5 264.5,302 260,302
  pour cut-out: -292.5,461.25 264.5,461.25 264.5,456.75 -292.5,456.75
  pour cut-out: 260,306.25 645.5,306.25 645.5,301.75 260,301.75
  pour cut-out: 641.25,306.5 645.75,306.5 645.75,-35.5 641.25,-35.5
  pour cut-out: 100.5,-178 390,-178 390,-183.5 100.5,-183.5
  pour cut-out: 100.5,-181.5 108.75,-181.5 108.75,-266.5 100.5,-266.5
  pour cut-out: 100.5,-261 128,-261 128,-266.5 100.5,-266.5
  pour cut-out: 276.12,-182.5 281.88,-182.5 281.88,-258.5 276.12,-258.5
  pour cut-out: 193,-255 282,-255 282,-260.5 193,-260.5
  pour cut-out: 385.12,-178 390.88,-178 390.88,-266.5 385.12,-266.5
  pour cut-out: 328,-261 390.5,-261 390.5,-266.5 328,-266.5
  pour cut-out: 535.25,-379.5 541,-379.5 541,-610.24 535.25,-610.24
  pour cut-out: 313.5,-379.5 541,-379.5 541,-385 313.5,-385
  pour cut-out: 313.12,-379.5 318.88,-379.5 318.88,-408 313.12,-408
  pour cut-out: 314,-540.5 319.75,-540.5 319.75,-561.5 314,-561.5
  pour cut-out: 314,-556 583.58,-556 583.58,-561.5 314,-561.5
Power_positive:
  pour cut-out: -60.5,374.5 -18.5,374.5 -18.5,369.5 -60.5,369.5
  pour cut-out: 18.5,372 62.5,372 62.5,367 18.5,367
  pour cut-out: 55,413.5 63.5,413.5 63.5,367 55,367
  pour cut-out: -60.5,414.5 63.5,414.5 63.5,410 -60.5,410
  pour cut-out: -60.5,414.5 -56,414.5 -56,369.5 -60.5,369.5
  pour cut-out: -22.5,374.5 -18,374.5 -18,331.5 -22.5,331.5
  pour cut-out: 16,372 20.5,372 20.5,332.5 16,332.5
  pour cut-out: 16,336.5 58,336.5 58,331.5 16,331.5
  pour cut-out: 55.25,336.5 59.75,336.5 59.75,292 55.25,292
  pour cut-out: 22.5,297 60,297 60,292 22.5,292
  pour cut-out: 22.5,297 29,297 29,-237.5 22.5,-237.5
  pour cut-out: -60,336.5 -18,336.5 -18,331.5 -60,331.5
  pour cut-out: -62.25,336.5 -57.75,336.5 -57.75,301.5 -62.25,301.5
  pour cut-out: -62,306.5 -20,306.5 -20,301.5 -62,301.5
  pour cut-out: -25,306.5 -18,306.5 -18,-347 -25,-347
  pour cut-out: 22.5,-231.5 130.88,-231.5 130.88,-237.5 22.5,-237.5
  pour cut-out: 123.75,-231.5 132,-231.5 132,-347 123.75,-347
  pour cut-out: -22.62,-341 132,-341 132,-347 -22.62,-347
  pour cut-out: -813,35.5 -197,35.5 -197,31.5 -813,31.5
  pour cut-out: -777,-263.75 -197,-263.75 -197,-273.25 -777,-273.25
  pour cut-out: -202.5,35.5 -197,35.5 -197,-269 -202.5,-269
  pour cut-out: -382.75,-411.5 -364.25,-411.5 -364.25,-801.56 -382.75,-801.56
  pour cut-out: -381.5,-411.5 -30.5,-411.5 -30.5,-421 -381.5,-421
  pour cut-out: -40.5,-412 -30.5,-412 -30.5,-550.96 -40.5,-550.96
  pour cut-out: -37.49,-541.5 102.01,-541.5 102.01,-551 -37.49,-551
  pour cut-out: 89,-409.67 99,-409.67 99,-552 89,-552
  pour cut-out: 183,-542 636,-542 636,-554 183,-554
  pour cut-out: 180.17,-410.02 187.5,-410.02 187.5,-553.96 180.17,-553.96
  pour cut-out: -701.5,409.25 -288,409.25 -288,404.75 -701.5,404.75
  pour cut-out: -292.5,461.5 -288,461.5 -288,407.5 -292.5,407.5
  pour cut-out: -292.5,461.25 264.5,461.25 264.5,456.75 -292.5,456.75
  pour cut-out: 260,461.49 264.5,461.49 264.5,301.99 260,301.99
  pour cut-out: 260,306.25 645.5,306.25 645.5,301.75 260,301.75
  pour cut-out: 641.25,306.5 645.75,306.5 645.75,-35.5 641.25,-35.5
  pour cut-out: 641.5,-30.25 804,-30.25 804,-34.75 641.5,-34.75

## Silkscreen, mask and mechanical layers (free items; w line width, h text height)
Top Overlay:
  lines w5: -325,-120 -255,-120 -255,80 -325,80 -325,-120
Mechanical 15:
  circle w2: c-350,-374 r49.21
  circle w2: c374,-350 r49.21
  circle w2: c350,374 r49.21
  circle w2: c-374,350 r49.21